# EAGLE board MultiBoard (EAGLE 6.4)
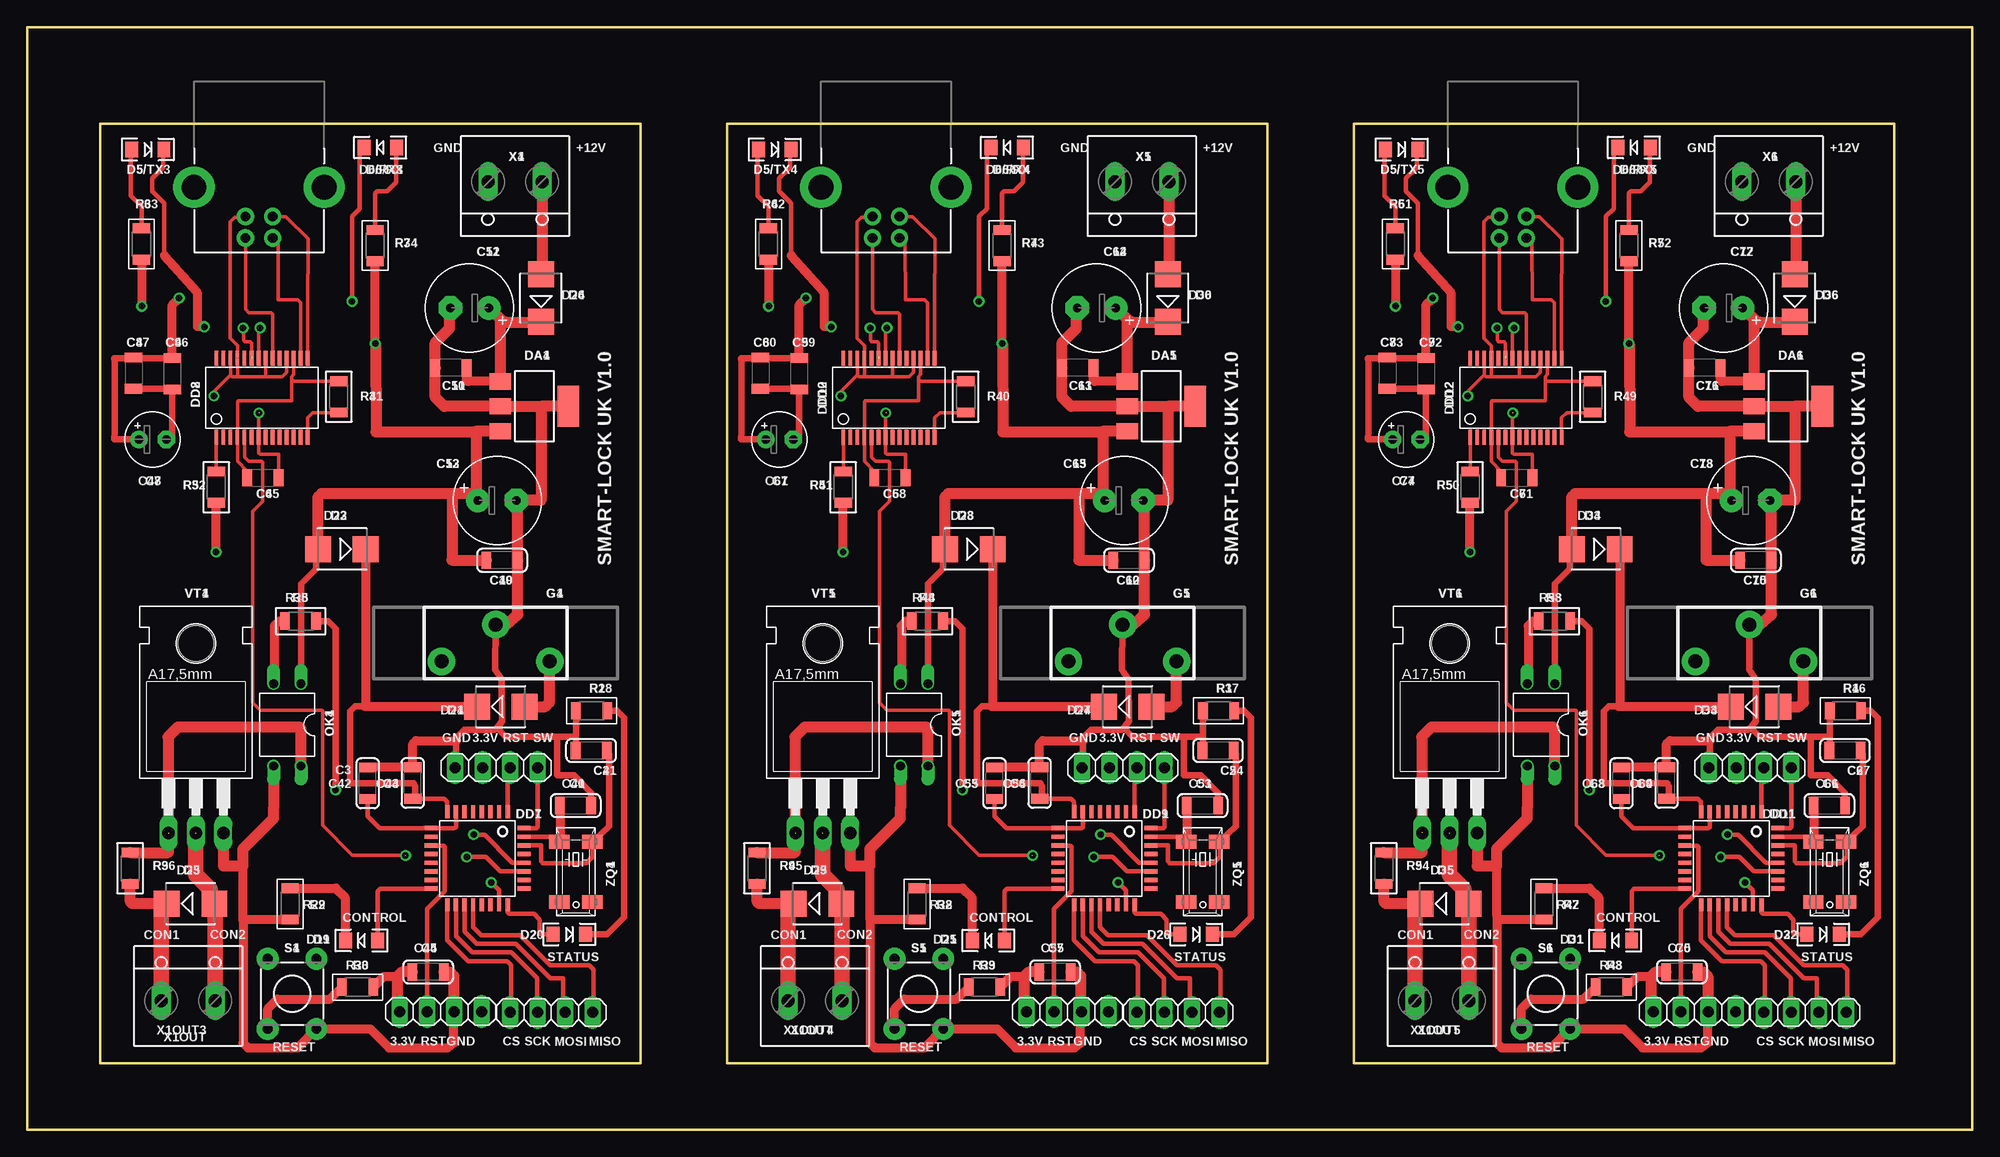
[diagram p0: board, top side]
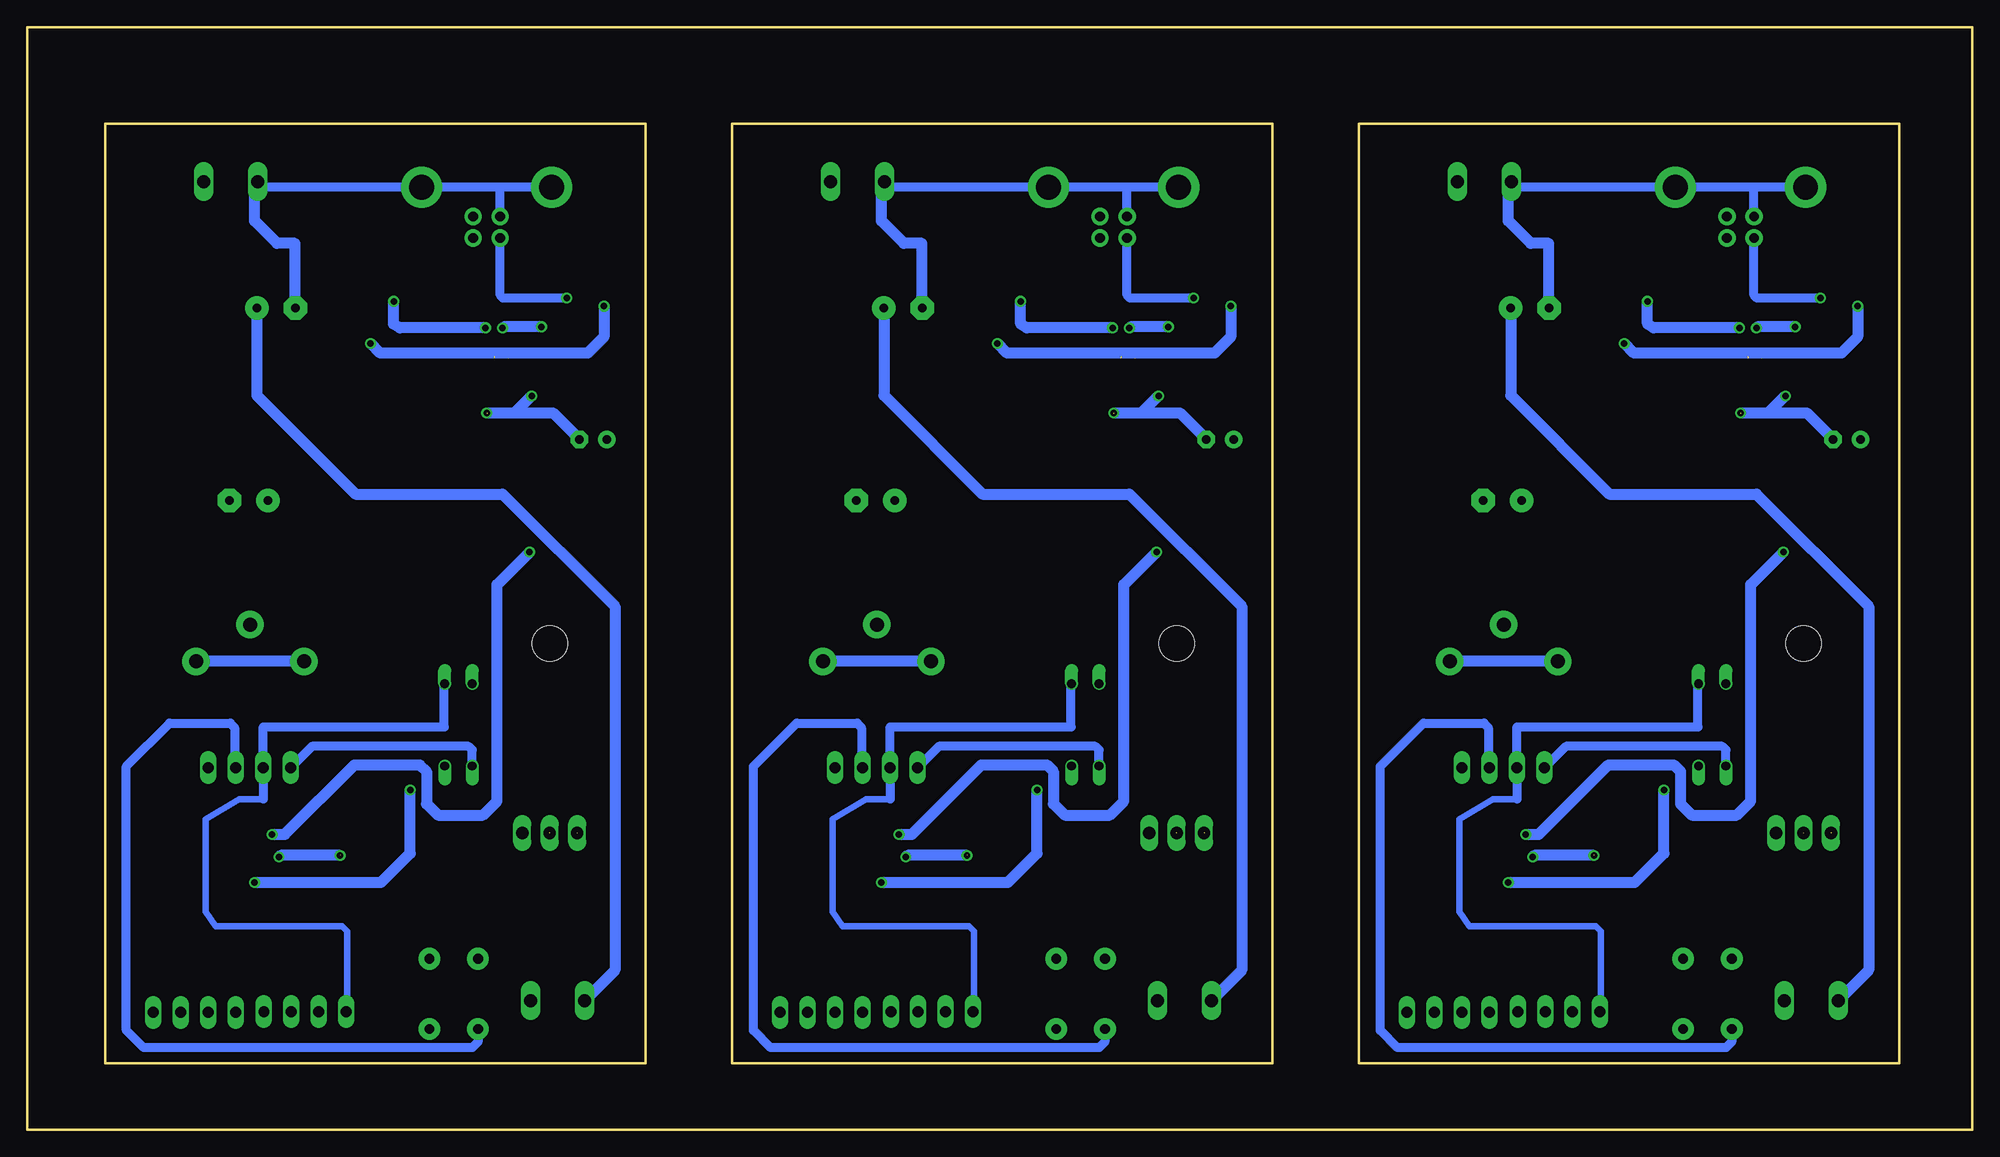
[diagram p1: board, bottom side, seen from below]

Size 180 x 102 mm. Coordinates in mm from the lower left corner, seen from the top.
Outline: 6.76,6.15 56.76,6.15 56.76,93.05 6.76,93.05 6.76,6.15
Outline: 64.76,6.15 114.76,6.15 114.76,93.05 64.76,93.05 64.76,6.15
Outline: 122.76,6.15 172.76,6.15 172.76,93.05 122.76,93.05 122.76,6.15
Outline: 0,0 0,102 180,102 180,0 0,0
Copper layers (1*16): Top 0.035mm / dielectric 1.5mm / Bottom 0.035mm
Design rules "default *": minimum track width 0.25mm, minimum drill 15mil, track to track 12mil, track to pad 12mil, pad to pad 12mil, via to via 12mil, smd to smd 8mil, copper to edge 10mil, drill to drill 10mil, minimum pad ring 8mil, minimum via ring 8mil, stop-mask expansion 4mil, vias tented up to drill 0mil, thermal gap 10mil

## Footprints (pad centres in the part's own frame; a part is rotated, then mirrored left to right if it is on the bottom)
C1206 = smd 0.9 x 1.6: 1 -1.45,0; 2 1.45,0
E2,5-5 = drill 0.8 pad 1.6: + -1.27,0 | drill 0.8 pad 1.6 octagon: - 1.27,0
E3,5-8 = drill 0.8 pad 2.184: + -1.778,0 | drill 0.8 pad 2.184 octagon: - 1.778,0
LED-1206 = smd 1.2 x 1.4: A -1.5,0; C 1.5,0
SMB = smd 2.4 x 2.4: A 2.2,0; C -2.2,0
SOT223 = smd 1.5 x 2: 1 -2.3,-3.15; 2 0,-3.15; 3 2.3,-3.15 | smd 3.8 x 2: 4 0,3.15
LQFP32-7X7 = smd 1.2 x 0.4: 1 -4.3,2.8; 2 -4.3,2; 3 -4.3,1.2; 4 -4.3,0.4; 5 -4.3,-0.4; 6 -4.3,-1.2; 7 -4.3,-2; 8 -4.3,-2.8; 17 4.3,-2.8; 18 4.3,-2; 19 4.3,-1.2; 20 4.3,-0.4; 21 4.3,0.4; 22 4.3,1.2; 23 4.3,2; 24 4.3,2.8 | smd 0.4 x 1.2: 9 -2.8,-4.3; 10 -2,-4.3; 11 -1.2,-4.3; 12 -0.4,-4.3; 13 0.4,-4.3; 14 1.2,-4.3; 15 2,-4.3; 16 2.8,-4.3; 25 2.8,4.3; 26 2,4.3; 27 1.2,4.3; 28 0.4,4.3; 29 -0.4,4.3; 30 -1.2,4.3; 31 -2,4.3; 32 -2.8,4.3
SSOP28DB = smd 0.348 x 1.397: 1 -4.225,-3.656; 2 -3.575,-3.656; 3 -2.925,-3.656; 4 -2.275,-3.656; 5 -1.625,-3.656; 6 -0.975,-3.656; 7 -0.325,-3.656; 8 0.325,-3.656; 9 0.975,-3.656; 10 1.625,-3.656; 11 2.275,-3.656; 12 2.925,-3.656; 13 3.575,-3.656; 14 4.225,-3.656; 15 4.225,3.656; 16 3.575,3.656; 17 2.925,3.656; 18 2.275,3.656; 19 1.625,3.656; 20 0.975,3.656; 21 0.325,3.656; 22 -0.325,3.656; 23 -0.975,3.656; 24 -1.625,3.656; 25 -2.275,3.656; 26 -2.925,3.656; 27 -3.575,3.656; 28 -4.225,3.656
CH74 = drill 1.3 pad 2.54: P$1+ -5.08,0; P$2+ 4.92,0; P$3- -0.08,3.4
USB-B-PTH = drill 0.9 pad 1.6: D+ 0,1.25; D- 1.981,1.25; GND 0,-1.25; VBUS 1.981,-1.25 | drill 2.3 pad 3.81: S1 -2.718,-6.02; S2 -2.718,6.02
DIL04 = drill 0.813 offset: 1 -1.27,-3.81; 2 1.27,-3.81; 3 1.27,3.81; 4 -1.27,3.81
M1206 = smd 0.9 x 1.6: 1 -1.45,0; 2 1.45,0
TL1105 = drill 0.9 pad 2: 1 -2.25,3.25; 2 2.25,3.25; 3 -2.25,-3.25; 4 2.25,-3.25
TO220 = drill 1.118 long: 1 -2.54,-6.35; 2 0,-6.35; 3 2.54,-6.35 | hole 3.302: 0,11.176
W237-102 = drill 1.2 long: 1 -2.5,-1.27; 2 2.5,-1.27
1X04 = drill 1.016 long: 1 -3.81,0; 2 -1.27,0; 3 1.27,0; 4 3.81,0
MM20SS = smd 1.27 x 1.88: 1 -2.794,-1.524; 2 2.794,-1.524; 3 2.794,1.524; 4 -2.794,1.524

## Placement (x,y rotation side)
C40  8p  [C1206]  50.75,29.98 180 top
C41  8p  [C1206]  52.2,35.08 0 top
C42  1u  [C1206]  31.52,32.05 90 top
C43  1u  [C1206]  35.69,32.07 90 top
C44  100n  [C1206]  37.11,14.6 180 top
C45  100n  [C1206]  21.83,60.3 0 top
C46  100n  [C1206]  13.45,69.93 270 top
C47  10n  [C1206]  9.85,69.98 270 top
C48  10u  [E2,5-5]  11.62,63.86 0 top
C49  1u  [C1206]  43.95,52.67 180 top
C50  100n  [C1206]  39.22,70.47 180 top
C51  470u  [E3,5-8]  40.95,76.02 180 top
C52  470u  [E3,5-8]  43.5,58.22 0 top
C53  8p  [C1206]  108.75,29.98 180 top
C54  8p  [C1206]  110.2,35.08 0 top
C55  1u  [C1206]  89.52,32.05 90 top
C56  1u  [C1206]  93.69,32.07 90 top
C57  100n  [C1206]  95.11,14.6 180 top
C58  100n  [C1206]  79.83,60.3 0 top
C59  100n  [C1206]  71.45,69.93 270 top
C60  10n  [C1206]  67.85,69.98 270 top
C61  10u  [E2,5-5]  69.62,63.86 0 top
C62  1u  [C1206]  101.95,52.67 180 top
C63  100n  [C1206]  97.22,70.47 180 top
C64  470u  [E3,5-8]  98.95,76.02 180 top
C65  470u  [E3,5-8]  101.5,58.22 0 top
C66  8p  [C1206]  166.75,29.98 180 top
C67  8p  [C1206]  168.2,35.08 0 top
C68  1u  [C1206]  147.52,32.05 90 top
C69  1u  [C1206]  151.69,32.07 90 top
C70  100n  [C1206]  153.11,14.6 180 top
C71  100n  [C1206]  137.83,60.3 0 top
C72  100n  [C1206]  129.45,69.93 270 top
C73  10n  [C1206]  125.85,69.98 270 top
C74  10u  [E2,5-5]  127.62,63.86 0 top
C75  1u  [C1206]  159.95,52.67 180 top
C76  100n  [C1206]  155.22,70.47 180 top
C77  470u  [E3,5-8]  156.95,76.02 180 top
C78  470u  [E3,5-8]  159.5,58.22 0 top
D5/TX3  RED  [LED-1206]  11.17,90.67 0 top
D5/TX4  RED  [LED-1206]  69.17,90.67 0 top
D5/TX5  RED  [LED-1206]  127.17,90.67 0 top
D6/RX3  RED  [LED-1206]  32.68,90.86 180 top
D6/RX4  RED  [LED-1206]  90.68,90.86 180 top
D6/RX5  RED  [LED-1206]  148.68,90.86 180 top
D19  RED  [LED-1206]  30.96,17.5 180 top
D20  RED  [LED-1206]  50.17,18.07 0 top
D21  SK24  [SMB]  43.83,39.14 0 top
D22  SK24  [SMB]  29.15,53.71 180 top
D23  SK24  [SMB]  15.14,20.92 0 top
D24  SK24  [SMB]  47.55,76.92 90 top
D25  RED  [LED-1206]  88.96,17.5 180 top
D26  RED  [LED-1206]  108.17,18.07 0 top
D27  SK24  [SMB]  101.83,39.14 0 top
D28  SK24  [SMB]  87.15,53.71 180 top
D29  SK24  [SMB]  73.14,20.92 0 top
D30  SK24  [SMB]  105.55,76.92 90 top
D31  RED  [LED-1206]  146.96,17.5 180 top
D32  RED  [LED-1206]  166.17,18.07 0 top
D33  SK24  [SMB]  159.83,39.14 0 top
D34  SK24  [SMB]  145.15,53.71 180 top
D35  SK24  [SMB]  131.14,20.92 0 top
D36  SK24  [SMB]  163.55,76.92 90 top
DA4  APU1206H-33  [SOT223]  46.95,66.92 270 top
DA5  APU1206H-33  [SOT223]  104.95,66.92 270 top
DA6  APU1206H-33  [SOT223]  162.95,66.92 270 top
DD7  STM8L152K6T6  [LQFP32-7X7]  41.68,25.1 270 top
DD8  FT232RLSSOP  [SSOP28DB]  21.75,67.71 0 top
DD9  STM8L152K6T6  [LQFP32-7X7]  99.68,25.1 270 top
DD10  FT232RLSSOP  [SSOP28DB]  79.75,67.71 0 top
DD11  STM8L152K6T6  [LQFP32-7X7]  157.68,25.1 270 top
DD12  FT232RLSSOP  [SSOP28DB]  137.75,67.71 0 top
G4  BAT_3VCH-74  [CH74]  43.44,43.33 0 top
G5  BAT_3VCH-74  [CH74]  101.44,43.33 0 top
G6  BAT_3VCH-74  [CH74]  159.44,43.33 0 top
JP4  USB-B  [USB-B-PTH]  21.47,84.47 270 top
JP5  USB-B  [USB-B-PTH]  79.47,84.47 270 top
JP6  USB-B  [USB-B-PTH]  137.47,84.47 270 top
OK4  PC817  [DIL04]  24.08,37.45 180 top
OK5  PC817  [DIL04]  82.08,37.45 180 top
OK6  PC817  [DIL04]  140.08,37.45 180 top
R28  330  [M1206]  52.24,38.75 0 top
R29  330  [M1206]  24.34,20.89 90 top
R30  10k  [M1206]  30.59,13.2 0 top
R31  10k  [M1206]  28.85,67.79 270 top
R32  270  [M1206]  17.52,59.44 270 top
R33  330  [M1206]  10.59,81.93 270 top
R34  330  [M1206]  32.22,81.78 270 top
R35  1k  [M1206]  25.31,47.05 180 top
R36  1k  [M1206]  9.54,24.19 270 top
R37  330  [M1206]  110.24,38.75 0 top
R38  330  [M1206]  82.34,20.89 90 top
R39  10k  [M1206]  88.59,13.2 0 top
R40  10k  [M1206]  86.85,67.79 270 top
R41  270  [M1206]  75.52,59.44 270 top
R42  330  [M1206]  68.59,81.93 270 top
R43  330  [M1206]  90.22,81.78 270 top
R44  1k  [M1206]  83.31,47.05 180 top
R45  1k  [M1206]  67.54,24.19 270 top
R46  330  [M1206]  168.24,38.75 0 top
R47  330  [M1206]  140.34,20.89 90 top
R48  10k  [M1206]  146.59,13.2 0 top
R49  10k  [M1206]  144.85,67.79 270 top
R50  270  [M1206]  133.52,59.44 270 top
R51  330  [M1206]  126.59,81.93 270 top
R52  330  [M1206]  148.22,81.78 270 top
R53  1k  [M1206]  141.31,47.05 180 top
R54  1k  [M1206]  125.54,24.19 270 top
S4  [TL1105]  24.52,12.57 0 top
S5  [TL1105]  82.52,12.57 0 top
S6  [TL1105]  140.52,12.57 0 top
VT4  TIP122  [TO220]  15.63,33.8 0 top
VT5  TIP122  [TO220]  73.63,33.8 0 top
VT6  TIP122  [TO220]  131.63,33.8 0 top
X1OUT3  [W237-102]  14.91,13.22 0 top
X1OUT4  [W237-102]  72.91,13.22 0 top
X1OUT5  [W237-102]  130.91,13.22 0 top
X4  [W237-102]  45.15,86.42 180 top
X5  [W237-102]  103.15,86.42 180 top
X6  [W237-102]  161.15,86.42 180 top
XP1.1-SPI3  [1X04]  48.51,10.85 0 top
XP1.1-SPI4  [1X04]  106.51,10.85 0 top
XP1.1-SPI5  [1X04]  164.51,10.85 0 top
XP1.2-SPI3  [1X04]  38.27,10.92 180 top
XP1.2-SPI4  [1X04]  96.27,10.92 180 top
XP1.2-SPI5  [1X04]  154.27,10.92 180 top
XP2-SWIM3  [1X04]  43.41,33.49 180 top
XP2-SWIM4  [1X04]  101.41,33.49 180 top
XP2-SWIM5  [1X04]  159.41,33.49 180 top
ZQ4  [MM20SS]  50.79,23.85 270 top
ZQ5  [MM20SS]  108.79,23.85 270 top
ZQ6  [MM20SS]  166.79,23.85 270 top

## Library data of the parts
C40-C44 C49 C53-C57 C62 C66-C70 C75 DA4-DA6 DD7 DD9 DD11 G4-G6 R28-R30 R33 R34 R37-R39 R42 R43 R46-R48 R51 R52 S4-S6 VT4-VT6 XP1.1-SPI3-XP1.1-SPI5 XP1.2-SPI3-XP1.2-SPI5 XP2-SWIM3-XP2-SWIM5 = SMART LOCK UK
C45-C47 C50 C58-C60 C63 C71-C73 C76 R31 R32 R35 R36 R40 R41 R44 R45 R49 R50 R53 R54 = CondAdapt
C48 C51 C52 C61 C64 C65 C74 C77 C78 = LAMP_RES
D5/TX3-D5/TX5 D6/RX3-D6/RX5 D19 D20 D25 D26 D31 D32 = SMART LOCK UK; PROD_ID: DIO-00809
D21-D24 D27-D30 D33-D36 = NOVOSIB
DD8 DD10 DD12 = Bullet_cont_prom; PROD_ID: IC-00870
JP4-JP6 = Bullet_cont_prom
OK4-OK6 = SMART LOCK UK; MPN: PC817X4J000F; OC_FARNELL: 9707727; OC_NEWARK: 97K7059
X1OUT3-X1OUT5 X4-X6 = SMART LOCK UK; MPN: 237-102; OC_FARNELL: unknown; OC_NEWARK: 70K9898
ZQ4-ZQ6 = SMART LOCK UK; OC_FARNELL: unknown; OC_NEWARK: unknown

## Nets
+3V4: C44.2 C49.2 C52.+ D22.A DA4.3 OK4.1 R30.2 R33.2 R34.2 XP1.2-SPI3.4 XP2-SWIM3.3
+3V5: C57.2 C62.2 C65.+ D28.A DA5.3 OK5.1 R39.2 R42.2 R43.2 XP1.2-SPI4.4 XP2-SWIM4.3
+3V6: C70.2 C75.2 C78.+ D34.A DA6.3 OK6.1 R48.2 R51.2 R52.2 XP1.2-SPI5.4 XP2-SWIM5.3
+12V3: C50.1 C51.+ D23.C D24.C DA4.1 R36.2 X1OUT3.1
+12V4: C63.1 C64.+ D29.C D30.C DA5.1 R45.2 X1OUT4.1
+12V5: C76.1 C77.+ D35.C D36.C DA6.1 R54.2 X1OUT5.1
CONTROL3: D19.A DD7.16
CONTROL4: D25.A DD9.16
CONTROL5: D31.A DD11.16
FT_RXD3: DD7.28 R32.2
FT_RXD4: DD9.28 R41.2
FT_RXD5: DD11.28 R50.2
FT_TXD3: DD7.27 DD8.5
FT_TXD4: DD9.27 DD10.5
FT_TXD5: DD11.27 DD12.5
GND3: C40.1 C41.1 C42.2 C43.2 C44.1 C45.2 C46.2 C47.2 C48.- C49.1 C50.2 C51.- C52.- DA4.2 DA4.4 DD8.7 DD8.18 DD8.21 DD8.25 DD8.26 G4.P$3- JP4.GND JP4.S1 JP4.S2 OK4.3 R28.1 R29.1 S4.4 VT4.3 X4.2 XP1.2-SPI3.2 XP2-SWIM3.4
GND4: C53.1 C54.1 C55.2 C56.2 C57.1 C58.2 C59.2 C60.2 C61.- C62.1 C63.2 C64.- C65.- DA5.2 DA5.4 DD10.7 DD10.18 DD10.21 DD10.25 DD10.26 G5.P$3- JP5.GND JP5.S1 JP5.S2 OK5.3 R37.1 R38.1 S5.4 VT5.3 X5.2 XP1.2-SPI4.2 XP2-SWIM4.4
GND5: C66.1 C67.1 C68.2 C69.2 C70.1 C71.2 C72.2 C73.2 C74.- C75.1 C76.2 C77.- C78.- DA6.2 DA6.4 DD12.7 DD12.18 DD12.21 DD12.25 DD12.26 G6.P$3- JP6.GND JP6.S1 JP6.S2 OK6.3 R46.1 R47.1 S6.4 VT6.3 X6.2 XP1.2-SPI5.2 XP2-SWIM5.4
MISO3: DD7.20 XP1.1-SPI3.4
MISO4: DD9.20 XP1.1-SPI4.4
MISO5: DD11.20 XP1.1-SPI5.4
MOSI3: DD7.19 XP1.1-SPI3.3
MOSI4: DD9.19 XP1.1-SPI4.3
MOSI5: DD11.19 XP1.1-SPI5.3
N$67: C40.2 DD7.31 ZQ4.1
N$68: C42.1 DD7.7 DD7.9
N$69: D20.C R28.2
N$70: D19.C R29.2
N$71: D21.A G4.P$1+ G4.P$2+
N$72: C43.1 D21.C D22.C DD7.8
N$73: C46.1 C47.1 C48.+ DD8.20 JP4.VBUS
N$74: DD8.16 JP4.D-
N$75: DD8.15 JP4.D+
N$76: C45.1 DD8.4 DD8.17 R31.1
N$77: DD8.14 R31.2
N$78: DD8.1 R32.1
N$79: D5/TX3.A R33.1
N$80: D6/RX3.A R34.1
N$81: D5/TX3.C DD8.23
N$82: D6/RX3.C DD8.22
N$83: D23.A VT4.2 X1OUT3.2
N$84: OK4.2 R35.2
N$85: DD7.23 R35.1
N$86: OK4.4 R36.1 VT4.1
N$87: D24.A X4.1
N$88: C41.2 DD7.30 ZQ4.4
N$89: C53.2 DD9.31 ZQ5.1
N$90: C55.1 DD9.7 DD9.9
N$91: D26.C R37.2
N$92: D25.C R38.2
N$93: D27.A G5.P$1+ G5.P$2+
N$94: C56.1 D27.C D28.C DD9.8
N$95: C59.1 C60.1 C61.+ DD10.20 JP5.VBUS
N$96: DD10.16 JP5.D-
N$97: DD10.15 JP5.D+
N$98: C58.1 DD10.4 DD10.17 R40.1
N$99: DD10.14 R40.2
N$100: DD10.1 R41.1
N$101: D5/TX4.A R42.1
N$102: D6/RX4.A R43.1
N$103: D5/TX4.C DD10.23
N$104: D6/RX4.C DD10.22
N$105: D29.A VT5.2 X1OUT4.2
N$106: OK5.2 R44.2
N$107: DD9.23 R44.1
N$108: OK5.4 R45.1 VT5.1
N$109: D30.A X5.1
N$110: C54.2 DD9.30 ZQ5.4
N$111: C66.2 DD11.31 ZQ6.1
N$112: C68.1 DD11.7 DD11.9
N$113: D32.C R46.2
N$114: D31.C R47.2
N$115: D33.A G6.P$1+ G6.P$2+
N$116: C69.1 D33.C D34.C DD11.8
N$117: C72.1 C73.1 C74.+ DD12.20 JP6.VBUS
N$118: DD12.16 JP6.D-
N$119: DD12.15 JP6.D+
N$120: C71.1 DD12.4 DD12.17 R49.1
N$121: DD12.14 R49.2
N$122: DD12.1 R50.1
N$123: D5/TX5.A R51.1
N$124: D6/RX5.A R52.1
N$125: D5/TX5.C DD12.23
N$126: D6/RX5.C DD12.22
N$127: D35.A VT6.2 X1OUT5.2
N$128: OK6.2 R53.2
N$129: DD11.23 R53.1
N$130: OK6.4 R54.1 VT6.1
N$131: D36.A X6.1
N$132: C67.2 DD11.30 ZQ6.4
NRST3: DD7.1 R30.1 S4.3 XP2-SWIM3.2
NRST4: DD9.1 R39.1 S5.3 XP2-SWIM4.2
NRST5: DD11.1 R48.1 S6.3 XP2-SWIM5.2
RESET3: DD7.11 XP1.2-SPI3.3
RESET4: DD9.11 XP1.2-SPI4.3
RESET5: DD11.11 XP1.2-SPI5.3
SC3: DD7.17 XP1.1-SPI3.1
SC4: DD9.17 XP1.1-SPI4.1
SC5: DD11.17 XP1.1-SPI5.1
SCK3: DD7.18 XP1.1-SPI3.2
SCK4: DD9.18 XP1.1-SPI4.2
SCK5: DD11.18 XP1.1-SPI5.2
STATUS3: D20.A DD7.24
STATUS4: D26.A DD9.24
STATUS5: D32.A DD11.24
SWIM3: DD7.32 XP2-SWIM3.1
SWIM4: DD9.32 XP2-SWIM4.1
SWIM5: DD11.32 XP2-SWIM5.1

## Tracks (layer width: path | path; a pad name or v marks a point on that pad's centre or on a via)
+3V4  (via drill 0.6)
  Top 0.305: 10.59,76.21 v10.62,76.18 | 34.24,11.14 XP1.2-SPI3.4 | v32.23,72.72 v32.22,72.73 | 26.74,53.92 D22.A | 26.95,58.58 27.24,58.87 | 41.62,64.61 41.55,64.11 | 41.55,58.39 C52.+ | 25.38,41.29 OK4.1
  Top 0.406: v32.22,72.73 32.25,72.71 | 41.49,64.58 41.55,64.11
  Top 0.61: 39.35,58.72 39.2,58.87 | 26.74,53.92 26.74,51.9 25.35,50.51 OK4.1
  Top 0.813: R33.2 10.59,76.21 | v32.22,72.73 R34.2 | 34.24,14.13 32.97,14.13 R30.2
  Top 1.016: C44.2 34.71,14.6 34.24,14.13 34.24,11.14 | DA4.3 43.36,64.61 41.62,64.61 | D22.A 26.95,58.58 | 27.24,58.87 39.2,58.87 41.07,58.87 C52.+ 41.4,58.22 | 41.55,64.11 41.55,58.39 | 32.25,72.71 32.28,64.56 41.49,64.58 | 39.35,58.72 39.35,52.7 39.33,52.68 C49.2
  Bottom 0.305: 25.4,41.21 OK4.1 | 34.4,10.98 XP1.2-SPI3.4
  Bottom 0.61: 42.14,30.57 44.39,30.57 47.48,28.72 47.48,20.17 46.55,18.82 34.85,18.82 34.4,18.37 34.4,10.98
  Bottom 0.813: 25.4,41.21 25.4,37.27 26.32,37.26 42.14,37.26 XP2-SWIM3.3 42.14,30.57
  Bottom 1.016: v10.62,76.18 10.62,73.33 12.12,71.83 31.32,71.83 v32.22,72.73
+3V5  (via drill 0.6)
  Top 0.305: 68.59,76.21 v68.62,76.18 | 92.24,11.14 XP1.2-SPI4.4 | v90.23,72.72 v90.22,72.73 | 84.74,53.92 D28.A | 84.95,58.58 85.24,58.87 | 99.62,64.61 99.55,64.11 | 99.55,58.39 C65.+ | 83.38,41.29 OK5.1
  Top 0.406: v90.22,72.73 90.25,72.71 | 99.49,64.58 99.55,64.11
  Top 0.61: 97.35,58.72 97.2,58.87 | 84.74,53.92 84.74,51.9 83.35,50.51 OK5.1
  Top 0.813: R42.2 68.59,76.21 | v90.22,72.73 R43.2 | 92.24,14.13 90.97,14.13 R39.2
  Top 1.016: C57.2 92.71,14.6 92.24,14.13 92.24,11.14 | DA5.3 101.36,64.61 99.62,64.61 | D28.A 84.95,58.58 | 85.24,58.87 97.2,58.87 99.07,58.87 C65.+ 99.4,58.22 | 99.55,64.11 99.55,58.39 | 90.25,72.71 90.28,64.56 99.49,64.58 | 97.35,58.72 97.35,52.7 97.33,52.68 C62.2
  Bottom 0.305: 83.4,41.21 OK5.1 | 92.4,10.98 XP1.2-SPI4.4
  Bottom 0.61: 100.14,30.57 102.39,30.57 105.48,28.72 105.48,20.17 104.55,18.82 92.85,18.82 92.4,18.37 92.4,10.98
  Bottom 0.813: 83.4,41.21 83.4,37.27 84.32,37.26 100.14,37.26 XP2-SWIM4.3 100.14,30.57
  Bottom 1.016: v68.62,76.18 68.62,73.33 70.12,71.83 89.32,71.83 v90.22,72.73
+3V6  (via drill 0.6)
  Top 0.305: 126.59,76.21 v126.62,76.18 | 150.24,11.14 XP1.2-SPI5.4 | v148.23,72.72 v148.22,72.73 | 142.74,53.92 D34.A | 142.95,58.58 143.24,58.87 | 157.62,64.61 157.55,64.11 | 157.55,58.39 C78.+ | 141.38,41.29 OK6.1
  Top 0.406: v148.22,72.73 148.25,72.71 | 157.49,64.58 157.55,64.11
  Top 0.61: 155.35,58.72 155.2,58.87 | 142.74,53.92 142.74,51.9 141.35,50.51 OK6.1
  Top 0.813: R51.2 126.59,76.21 | v148.22,72.73 R52.2 | 150.24,14.13 148.97,14.13 R48.2
  Top 1.016: C70.2 150.71,14.6 150.24,14.13 150.24,11.14 | DA6.3 159.36,64.61 157.62,64.61 | D34.A 142.95,58.58 | 143.24,58.87 155.2,58.87 157.07,58.87 C78.+ 157.4,58.22 | 157.55,64.11 157.55,58.39 | 148.25,72.71 148.28,64.56 157.49,64.58 | 155.35,58.72 155.35,52.7 155.33,52.68 C75.2
  Bottom 0.305: 141.4,41.21 OK6.1 | 150.4,10.98 XP1.2-SPI5.4
  Bottom 0.61: 158.14,30.57 160.39,30.57 163.48,28.72 163.48,20.17 162.55,18.82 150.85,18.82 150.4,18.37 150.4,10.98
  Bottom 0.813: 141.4,41.21 141.4,37.27 142.32,37.26 158.14,37.26 XP2-SWIM5.3 158.14,30.57
  Bottom 1.016: v126.62,76.18 126.62,73.33 128.12,71.83 147.32,71.83 v148.22,72.73
+12V3
  Top 0.305: 44.41,74.66 44.4,74.67 | 40.78,69.22 40.66,69.34 | C50.1
  Top 0.61: 12.41,20.39 D23.C | 9.7,20.92 9.55,21.07 | R36.2
  Top 0.813: 47.5,74.67 D24.C | DA4.1 40.78,69.22 | 40.66,69.34 C50.1
  Top 1.016: D23.C 9.7,20.92 | 9.55,21.07 R36.2 | 47.5,74.67 44.4,74.67 44.08,74.67 43.8,74.95 | 43.8,74.95 C51.+ | DA4.1 43.8,74.95
  Top 1.422: X1OUT3.1 12.41,20.39
  Bottom 1.016: C51.+ 42.73,67.93 33.6,58.8 20,58.8 9.6,48.4 9.6,14.76 X1OUT3.1
+12V4
  Top 0.305: 102.41,74.66 102.4,74.67 | 98.78,69.22 98.66,69.34 | C63.1
  Top 0.61: 70.41,20.39 D29.C | 67.7,20.92 67.55,21.07 | R45.2
  Top 0.813: 105.5,74.67 D30.C | DA5.1 98.78,69.22 | 98.66,69.34 C63.1
  Top 1.016: D29.C 67.7,20.92 | 67.55,21.07 R45.2 | 105.5,74.67 102.4,74.67 102.08,74.67 101.8,74.95 | 101.8,74.95 C64.+ | DA5.1 101.8,74.95
  Top 1.422: X1OUT4.1 70.41,20.39
  Bottom 1.016: C64.+ 100.73,67.93 91.6,58.8 78,58.8 67.6,48.4 67.6,14.76 X1OUT4.1
+12V5
  Top 0.305: 160.41,74.66 160.4,74.67 | 156.78,69.22 156.66,69.34 | C76.1
  Top 0.61: 128.41,20.39 D35.C | 125.7,20.92 125.55,21.07 | R54.2
  Top 0.813: 163.5,74.67 D36.C | DA6.1 156.78,69.22 | 156.66,69.34 C76.1
  Top 1.016: D35.C 125.7,20.92 | 125.55,21.07 R54.2 | 163.5,74.67 160.4,74.67 160.08,74.67 159.8,74.95 | 159.8,74.95 C77.+ | DA6.1 159.8,74.95
  Top 1.422: X1OUT5.1 128.41,20.39
  Bottom 1.016: C77.+ 158.73,67.93 149.6,58.8 136,58.8 125.6,48.4 125.6,14.76 X1OUT5.1
CONTROL3
  Top 0.406: D19.A 32.46,22.07 32.68,22.29 DD7.16
CONTROL4
  Top 0.406: D25.A 90.46,22.07 90.68,22.29 DD9.16
CONTROL5
  Top 0.406: D31.A 148.46,22.07 148.68,22.29 DD11.16
FT_RXD3  (via drill 0.6)
  Top 0.305: 17.5,57.97 R32.2
  Top 0.406: DD7.28 44.9,24.69 43.6,26 43.6,26.02 42.33,27.29 41.35,27.29 v41.33,27.31
  Top 0.813: v17.5,53.44 17.5,57.97
  Bottom 1.016: v41.33,27.31 40.14,27.31 33.69,33.76 27.65,33.76 27.03,33.14 27.03,30.15 25.97,29.09 21.81,29.09 20.51,30.39 20.51,50.43 v17.5,53.44
FT_RXD4  (via drill 0.6)
  Top 0.305: 75.5,57.97 R41.2
  Top 0.406: DD9.28 102.9,24.69 101.6,26 101.6,26.02 100.33,27.29 99.35,27.29 v99.33,27.31
  Top 0.813: v75.5,53.44 75.5,57.97
  Bottom 1.016: v99.33,27.31 98.14,27.31 91.69,33.76 85.65,33.76 85.03,33.14 85.03,30.15 83.97,29.09 79.81,29.09 78.51,30.39 78.51,50.43 v75.5,53.44
FT_RXD5  (via drill 0.6)
  Top 0.305: 133.5,57.97 R50.2
  Top 0.406: DD11.28 160.9,24.69 159.6,26 159.6,26.02 158.33,27.29 157.35,27.29 v157.33,27.31
  Top 0.813: v133.5,53.44 133.5,57.97
  Bottom 1.016: v157.33,27.31 156.14,27.31 149.69,33.76 143.65,33.76 143.03,33.14 143.03,30.15 141.97,29.09 137.81,29.09 136.51,30.39 136.51,50.43 v133.5,53.44
FT_TXD3  (via drill 0.6)  (1 unrouted)
  Top 0.305: DD8.5 20.12,62.19 20.5,61.82 21.73,61.82 21.81,61.74 21.81,58.14 20.87,57.2 20.87,39.51 21.59,38.79 27.3,38.79 27.35,38.74 27.35,28.15 30.07,25.38 34.97,25.38
  Top 0.406: DD7.27 43.77,23.91 42.44,25.24 v40.7,25.24 v40.69,25.23
  Bottom 1.016: v35.03,25.37 40.53,25.37 v40.69,25.23
FT_TXD4  (via drill 0.6)  (1 unrouted)
  Top 0.305: DD10.5 78.12,62.19 78.5,61.82 79.73,61.82 79.81,61.74 79.81,58.14 78.87,57.2 78.87,39.51 79.59,38.79 85.3,38.79 85.35,38.74 85.35,28.15 88.07,25.38 92.97,25.38
  Top 0.406: DD9.27 101.77,23.91 100.44,25.24 v98.7,25.24 v98.69,25.23
  Bottom 1.016: v93.03,25.37 98.53,25.37 v98.69,25.23
FT_TXD5  (via drill 0.6)  (1 unrouted)
  Top 0.305: DD12.5 136.12,62.19 136.5,61.82 137.73,61.82 137.81,61.74 137.81,58.14 136.87,57.2 136.87,39.51 137.59,38.79 143.3,38.79 143.35,38.74 143.35,28.15 146.07,25.38 150.97,25.38
  Top 0.406: DD11.27 159.77,23.91 158.44,25.24 v156.7,25.24 v156.69,25.23
  Bottom 1.016: v151.03,25.37 156.53,25.37 v156.69,25.23
GND3  (via drill 0.6)  (2 unrouted)
  Top 0.305: 39.49,10.97 XP1.2-SPI3.2 | 45.2,52.47 C49.1 | 39.2,75.99 C51.- 39.08,75.93 | 31.54,33.52 C42.2 | C45.2 23.28,62.46 23.27,62.47 21.58,62.47 21.43,62.57 21.43,64 DD8.7 21.43,66.27 | DD8.26 18.82,69.81 | 18.82,69.81 18.99,69.65 19.59,69.65 | 19.59,69.65 22.07,69.65 | 22.07,69.65 23.62,69.65 24.03,70.08 24.03,71.32 DD8.18 | 19.48,71.35 19.48,69.78 19.59,69.65 | DD8.21 22.07,69.66 22.07,69.65 | v17.3,67.87 17.3,68.29 18.82,69.81 | DD8.25 19.48,72.53 18.8,73.2 18.8,84 19.2,84.4 20.15,84.4 JP4.GND
  Top 0.406: C46.2 13.45,68.53 | 20.06,19.44 20.02,19.4
  Top 0.61: C46.2 13.45,63.86 C48.- | 13.45,68.53 C47.2 | G4.P$3- 43.33,42.57 43.93,41.68 43.94,37.79 43.48,37.19 | 43.48,37.19 43.28,37 40.45,37 39.71,36.26 39.71,36 39.71,33.6 | 39.57,33.52 XP2-SWIM3.4 | C40.1 52.18,30 52.18,31.19 50.6,32.77 49.04,32.77 49.04,36.37 | 49.04,36.37 44.3,36.37 43.48,37.19 | C41.1 50.79,36.37 | 50.79,36.37 49.04,36.37 | R28.1 50.79,36.37 | 20,19.38 20.02,19.4
  Top 0.813: 20,19.38 20,8.02 20.45,7.57 25.02,7.57 S4.4 31.75,9.32 33.5,7.57 38.9,7.57 39.49,8.04 39.49,10.75 XP1.2-SPI3.2 | 39.71,33.6 XP2-SWIM3.4 | 31.54,33.52 C43.2 35.69,35.69 36,36 39.71,36 | R29.1 20.06,19.44 | 20.02,19.4 19.98,19.96 19.99,24.41
  Top 1.016: 47.55,66.92 DA4.2 38.6,66.92 37.77,67.75 C50.2 37.77,72.81 39.08,74.12 39.08,75.93 | 47.55,66.92 47.55,58.22 C52.- 45.4,58.1 C49.1 45.4,47.65 44.31,46.73 G4.P$3- | DA4.4 47.55,66.92 | OK4.3 22.81,29.75 22.8,29.74 22.8,28.8 19.99,25.99 19.99,24.41 | C44.1 39.1,14.6 39.49,14.21 39.49,10.97 | VT4.3 18.17,24.41 19.99,24.41 | 19.99,24.41
  Bottom 0.406: 20.22,87.01 20.4,87.19
  Bottom 0.813: OK4.3 22.81,35.13 23.15,35.47 37.62,35.47 XP2-SWIM3.4 | JP4.S1 20.4,87.19 JP4.S2 42.15,87.19 X4.2 | JP4.GND 20.22,87.01
  Bottom 1.016: X4.2 42.95,87.39 42.95,84.07 40.87,81.99 39.2,81.99 39.2,76.02 C51.- | C48.- 15.33,66.3 v21.46,66.3 18.87,66.3 v17.3,67.87
GND4  (via drill 0.6)  (2 unrouted)
  Top 0.305: 97.49,10.97 XP1.2-SPI4.2 | 103.2,52.47 C62.1 | 97.2,75.99 C64.- 97.08,75.93 | 89.54,33.52 C55.2 | C58.2 81.28,62.46 81.27,62.47 79.58,62.47 79.43,62.57 79.43,64 DD10.7 79.42,66.27 | DD10.26 76.83,69.81 | 76.83,69.81 76.99,69.65 77.59,69.65 | 77.59,69.65 80.07,69.65 | 80.07,69.65 81.62,69.65 82.03,70.08 82.03,71.32 DD10.18 | 77.48,71.35 77.48,69.78 77.59,69.65 | DD10.21 80.08,69.66 80.07,69.65 | v75.3,67.87 75.3,68.29 76.83,69.81 | DD10.25 77.47,72.53 76.8,73.2 76.8,84 77.2,84.4 78.15,84.4 JP5.GND
  Top 0.406: C59.2 71.45,68.53 | 78.06,19.44 78.02,19.4
  Top 0.61: C59.2 71.45,63.86 C61.- | 71.45,68.53 C60.2 | G5.P$3- 101.33,42.57 101.93,41.68 101.94,37.79 101.47,37.19 | 101.47,37.19 101.28,37 98.45,37 97.71,36.26 97.71,36 97.71,33.6 | 97.57,33.52 XP2-SWIM4.4 | C53.1 110.18,30 110.18,31.19 108.6,32.77 107.04,32.77 107.04,36.37 | 107.04,36.37 102.3,36.37 101.47,37.19 | C54.1 108.79,36.37 | 108.79,36.37 107.04,36.37 | R37.1 108.79,36.37 | 78,19.38 78.02,19.4
  Top 0.813: 78,19.38 78,8.02 78.45,7.57 83.02,7.57 S5.4 89.75,9.32 91.5,7.57 96.9,7.57 97.49,8.04 97.49,10.75 XP1.2-SPI4.2 | 97.71,33.6 XP2-SWIM4.4 | 89.54,33.52 C56.2 93.69,35.69 94,36 97.71,36 | R38.1 78.06,19.44 | 78.02,19.4 77.98,19.96 77.99,24.41
  Top 1.016: 105.55,66.92 DA5.2 96.6,66.92 95.77,67.75 C63.2 95.77,72.81 97.08,74.12 97.08,75.93 | 105.55,66.92 105.55,58.22 C65.- 103.4,58.1 C62.1 103.4,47.65 102.31,46.73 G5.P$3- | DA5.4 105.55,66.92 | OK5.3 80.81,29.75 80.8,29.74 80.8,28.8 77.99,25.99 77.99,24.41 | C57.1 97.1,14.6 97.49,14.21 97.49,10.97 | VT5.3 76.17,24.41 77.99,24.41 | 77.99,24.41
  Bottom 0.406: 78.22,87.01 78.4,87.19
  Bottom 0.813: OK5.3 80.81,35.13 81.15,35.47 95.62,35.47 XP2-SWIM4.4 | JP5.S1 78.4,87.19 JP5.S2 100.15,87.19 X5.2 | JP5.GND 78.22,87.01
  Bottom 1.016: X5.2 100.95,87.39 100.95,84.07 98.87,81.99 97.2,81.99 97.2,76.02 C64.- | C61.- 73.33,66.3 v79.46,66.3 76.87,66.3 v75.3,67.87
GND5  (via drill 0.6)  (2 unrouted)
  Top 0.305: 155.49,10.97 XP1.2-SPI5.2 | 161.2,52.47 C75.1 | 155.2,75.99 C77.- 155.08,75.93 | 147.54,33.52 C68.2 | C71.2 139.28,62.46 139.27,62.47 137.58,62.47 137.43,62.57 137.43,64 DD12.7 137.43,66.27 | DD12.26 134.82,69.81 | 134.82,69.81 134.99,69.65 135.59,69.65 | 135.59,69.65 138.07,69.65 | 138.07,69.65 139.62,69.65 140.03,70.08 140.03,71.32 DD12.18 | 135.48,71.35 135.48,69.78 135.59,69.65 | DD12.21 138.07,69.66 138.07,69.65 | v133.3,67.87 133.3,68.29 134.82,69.81 | DD12.25 135.47,72.53 134.8,73.2 134.8,84 135.2,84.4 136.15,84.4 JP6.GND
  Top 0.406: C72.2 129.45,68.53 | 136.06,19.44 136.02,19.4
  Top 0.61: C72.2 129.45,63.86 C74.- | 129.45,68.53 C73.2 | G6.P$3- 159.33,42.57 159.93,41.68 159.94,37.79 159.47,37.19 | 159.47,37.19 159.28,37 156.45,37 155.71,36.26 155.71,36 155.71,33.6 | 155.57,33.52 XP2-SWIM5.4 | C66.1 168.18,30 168.18,31.19 166.6,32.77 165.04,32.77 165.04,36.37 | 165.04,36.37 160.3,36.37 159.47,37.19 | C67.1 166.79,36.37 | 166.79,36.37 165.04,36.37 | R46.1 166.79,36.37 | 136,19.38 136.02,19.4
  Top 0.813: 136,19.38 136,8.02 136.45,7.57 141.02,7.57 S6.4 147.75,9.32 149.5,7.57 154.9,7.57 155.49,8.04 155.49,10.75 XP1.2-SPI5.2 | 155.71,33.6 XP2-SWIM5.4 | 147.54,33.52 C69.2 151.69,35.69 152,36 155.71,36 | R47.1 136.06,19.44 | 136.02,19.4 135.98,19.96 135.99,24.41
  Top 1.016: 163.55,66.92 DA6.2 154.6,66.92 153.77,67.75 C76.2 153.77,72.81 155.08,74.12 155.08,75.93 | 163.55,66.92 163.55,58.22 C78.- 161.4,58.1 C75.1 161.4,47.65 160.31,46.73 G6.P$3- | DA6.4 163.55,66.92 | OK6.3 138.81,29.75 138.8,29.74 138.8,28.8 135.99,25.99 135.99,24.41 | C70.1 155.1,14.6 155.49,14.21 155.49,10.97 | VT6.3 134.17,24.41 135.99,24.41 | 135.99,24.41
  Bottom 0.406: 136.22,87.01 136.4,87.19
  Bottom 0.813: OK6.3 138.81,35.13 139.15,35.47 153.62,35.47 XP2-SWIM5.4 | JP6.S1 136.4,87.19 JP6.S2 158.15,87.19 X6.2 | JP6.GND 136.22,87.01
  Bottom 1.016: X6.2 158.95,87.39 158.95,84.07 156.87,81.99 155.2,81.99 155.2,76.02 C77.- | C74.- 131.33,66.3 v137.46,66.3 134.87,66.3 v133.3,67.87
MISO3
  Top 0.406: DD7.20 41.28,18.72 42,18 45.6,18 48.4,15.2 52,15.2 52.4,14.8 52.4,10.93 XP1.1-SPI3.4
MISO4
  Top 0.406: DD9.20 99.28,18.72 100,18 103.6,18 106.4,15.2 110,15.2 110.4,14.8 110.4,10.93 XP1.1-SPI4.4
MISO5
  Top 0.406: DD11.20 157.28,18.72 158,18 161.6,18 164.4,15.2 168,15.2 168.4,14.8 168.4,10.93 XP1.1-SPI5.4
MOSI3
  Top 0.406: DD7.19 40.48,18.32 41.6,17.2 45.2,17.2 48.4,14 49.6,14 49.6,11.03 XP1.1-SPI3.3
MOSI4
  Top 0.406: DD9.19 98.48,18.32 99.6,17.2 103.2,17.2 106.4,14 107.6,14 107.6,11.03 XP1.1-SPI4.3
MOSI5
  Top 0.406: DD11.19 156.48,18.32 157.6,17.2 161.2,17.2 164.4,14 165.6,14 165.6,11.03 XP1.1-SPI5.3
N$67
  Top 0.406: 49.3,26.68 ZQ4.1 48.81,27.1 DD7.31
  Top 0.813: C40.2 49.3,26.68
N$68
  Top 0.305: 39.54,27.9 39.68,28 | 39.68,29.38 DD7.7
  Top 0.406: C42.1 31.52,29.02 32.64,27.9 DD7.9 39.54,27.9 | 39.68,28 39.68,29.38
N$69
  Top 0.305: D20.C
  Top 0.61: R28.2 54.59,38.75 55.24,38.1 55.24,19.64 53.67,18.07 D20.C
N$70
  Top 0.406: 29.42,17.54 D19.C
  Top 0.813: R29.2 28.57,22.34 29.42,21.49 29.42,17.54
N$71
  Top 0.305: G4.P$2+
  Top 1.016: D21.A 47.97,39.14 48.35,39.52 G4.P$2+
  Bottom 1.016: G4.P$1+ G4.P$2+
N$72
  Top 0.305: D21.C | 31.35,39.25 31.25,39.15
  Top 0.406: C43.1 38.6,30.62 38.88,30.34 DD7.8
  Top 0.61: C43.1 35.91,30.84 35.91,31.75 35.79,32.06 29.9,32.06 29.9,38.71 30.34,39.15 31.25,39.15
  Top 0.813: 41.87,39.38 D21.C | 31.25,39.15 D21.C | D22.C 31.35,39.25
N$73  (via drill 0.6)
  Top 0.305: JP4.VBUS 20.22,75.88 20.52,75.58 22.57,75.58 22.73,75.42 DD8.20
  Top 0.406: 9.85,71.38 C47.1 9.8,71.38 | C48.+ 10.35,63.88
  Top 0.61: 9.85,71.38 C46.1 | 10.35,63.88 8.08,63.88 8.1,64.61 8.1,71.06 8.08,71.38 9.8,71.38
  Top 0.813: C46.1 13.45,76.31 v14.07,76.93
  Bottom 0.813: v14.07,76.93 19.95,76.93 20.22,77.2 JP4.VBUS
N$74
  Top 0.305: DD8.16 25.32,76.48 25.05,76.76 23.26,76.76 23.25,81.96 JP4.D-
N$75
  Top 0.305: DD8.15 25.97,79.14 26,79.23 26,82.4 23.93,84.47 JP4.D+
N$76
  Top 0.305: C45.1 20.38,60.93 19.48,61.83 DD8.4 19.48,67.34 19.55,67.42 24.5,67.42 24.5,69.4 | 24.5,69.4 24.5,69.64 24.67,69.88 DD8.17 | R31.1 24.71,69.24 24.5,69.4
N$77
  Top 0.305: R31.2 26.45,66.34 25.98,65.87 DD8.14
N$78
  Top 0.305: DD8.1 R32.1
  Top 0.406: R32.1
N$79
  Top 0.406: R33.1 10.59,85.41 9.6,86.4 9.6,90.6 D5/TX3.A
N$80
  Top 0.406: R34.1 32.22,86.62 32.4,86.8 33.3,86.8 34.16,87.66 34.16,90.84 D6/RX3.A
N$81  (via drill 0.6)  (1 unrouted)
  Top 0.305: 20.77,71.53 20.77,72.77 20.67,72.91 20.14,72.91 20.03,73.02 20.03,74 | 20.03,74 20.03,74.22 | v20,74.16 20,74.03 20.03,74
  Top 0.406: 12.71,80.86 12.71,85.69 11.6,86.8 11.6,88 12.6,89 12.6,90.6 D5/TX3.C
  Top 0.813: 12.71,80.86 15.73,77.45 15.75,74.3 v16.4,74.27
  Bottom 0.406: 19.89,74.27 v20,74.16
  Bottom 1.016: v16.4,74.27 19.89,74.27
N$82  (via drill 0.6)
  Top 0.305: DD8.22 21.43,74.2 21.55,74.2 v21.57,74.18 | v30.08,76.64 v30.07,76.63
  Top 0.406: v30.08,76.64 30.08,84.48 30.8,85.2 30.8,90.48 D6/RX3.C
  Bottom 1.016: v21.57,74.18 29.5,74.18 30.08,74.55 v30.07,76.63
N$83  (1 unrouted)
  Top 0.61: 17.41,20.43 16.8,21.04 17.22,21.04 D23.A 16.95,21.31
  Top 1.422: X1OUT3.2 17.41,20.43 | 16.95,21.31 16.95,22.24 15.6,23.59 15.6,27.42
N$84
  Top 0.305: 22.89,41.34 OK4.2
  Top 0.813: R35.2 23.34,47.05 22.89,46.6 22.89,41.34
N$85  (via drill 0.6)
  Top 0.305: R35.1
  Top 0.406: DD7.23 43.68,22.14 v42.95,22.87
  Top 0.61: v28.55,31.42 28.55,46.36 27.87,47.04 R35.1
  Bottom 1.016: v42.95,22.87 31.25,22.87 28.55,25.57 v28.55,31.42
N$86  (1 unrouted)
  Top 1.016: OK4.4 25.35,37.09 25.2,37.24 13.95,37.24 13.05,36.34 13.05,27.49 | R36.1 13.04,25.64 13.1,25.7 VT4.1
N$87
  Top 0.61: 47.65,79.22 D24.A
  Top 1.016: X4.1 47.65,79.22
N$88
  Top 0.406: DD7.30 47.53,26.3 47.55,26.32 47.55,24.82 47.7,24.67 51.75,24.67 52.35,25.27 52.35,26.61 ZQ4.4
  Top 0.61: C41.2 53.86,34.71 53.86,28.05 ZQ4.4
N$89
  Top 0.406: 107.3,26.68 ZQ5.1 106.81,27.1 DD9.31
  Top 0.813: C53.2 107.3,26.68
N$90
  Top 0.305: 97.54,27.9 97.68,28 | 97.68,29.38 DD9.7
  Top 0.406: C55.1 89.52,29.02 90.64,27.9 DD9.9 97.54,27.9 | 97.68,28 97.68,29.38
N$91
  Top 0.305: D26.C
  Top 0.61: R37.2 112.59,38.75 113.24,38.1 113.24,19.64 111.67,18.07 D26.C
N$92
  Top 0.406: 87.42,17.54 D25.C
  Top 0.813: R38.2 86.57,22.34 87.42,21.49 87.42,17.54
N$93
  Top 0.305: G5.P$2+
  Top 1.016: D27.A 105.97,39.14 106.35,39.52 G5.P$2+
  Bottom 1.016: G5.P$1+ G5.P$2+
N$94
  Top 0.305: D27.C | 89.35,39.25 89.25,39.15
  Top 0.406: C56.1 96.6,30.62 96.88,30.34 DD9.8
  Top 0.61: C56.1 93.91,30.84 93.91,31.75 93.79,32.06 87.9,32.06 87.9,38.71 88.34,39.15 89.25,39.15
  Top 0.813: 99.87,39.38 D27.C | 89.25,39.15 D27.C | D28.C 89.35,39.25
N$95  (via drill 0.6)
  Top 0.305: JP5.VBUS 78.22,75.88 78.52,75.58 80.57,75.58 80.73,75.42 DD10.20
  Top 0.406: 67.85,71.38 C60.1 67.8,71.38 | C61.+ 68.35,63.88
  Top 0.61: 67.85,71.38 C59.1 | 68.35,63.88 66.08,63.88 66.1,64.61 66.1,71.06 66.08,71.38 67.8,71.38
  Top 0.813: C59.1 71.45,76.31 v72.07,76.93
  Bottom 0.813: v72.07,76.93 77.95,76.93 78.22,77.2 JP5.VBUS
N$96
  Top 0.305: DD10.16 83.33,76.48 83.05,76.76 81.26,76.76 81.25,81.96 JP5.D-
N$97
  Top 0.305: DD10.15 83.97,79.14 84,79.23 84,82.4 81.93,84.47 JP5.D+
N$98
  Top 0.305: C58.1 78.38,60.93 77.48,61.83 DD10.4 77.47,67.34 77.55,67.42 82.5,67.42 82.5,69.4 | 82.5,69.4 82.5,69.64 82.67,69.88 DD10.17 | R40.1 82.71,69.24 82.5,69.4
N$99
  Top 0.305: R40.2 84.45,66.34 83.98,65.87 DD10.14
N$100
  Top 0.305: DD10.1 R41.1
  Top 0.406: R41.1
N$101
  Top 0.406: R42.1 68.59,85.41 67.6,86.4 67.6,90.6 D5/TX4.A
N$102
  Top 0.406: R43.1 90.22,86.62 90.4,86.8 91.3,86.8 92.16,87.66 92.16,90.84 D6/RX4.A
N$103  (via drill 0.6)  (1 unrouted)
  Top 0.305: 78.77,71.53 78.77,72.77 78.67,72.91 78.14,72.91 78.03,73.02 78.03,74 | 78.03,74 78.03,74.22 | v78,74.16 78,74.03 78.03,74
  Top 0.406: 70.71,80.86 70.71,85.69 69.6,86.8 69.6,88 70.6,89 70.6,90.6 D5/TX4.C
  Top 0.813: 70.71,80.86 73.73,77.45 73.75,74.3 v74.4,74.27
  Bottom 0.406: 77.89,74.27 v78,74.16
  Bottom 1.016: v74.4,74.27 77.89,74.27
N$104  (via drill 0.6)
  Top 0.305: DD10.22 79.42,74.2 79.55,74.2 v79.57,74.18 | v88.08,76.64 v88.07,76.63
  Top 0.406: v88.08,76.64 88.08,84.48 88.8,85.2 88.8,90.48 D6/RX4.C
  Bottom 1.016: v79.57,74.18 87.5,74.18 88.08,74.55 v88.07,76.63
N$105  (1 unrouted)
  Top 0.61: 75.41,20.43 74.8,21.04 75.22,21.04 D29.A 74.95,21.31
  Top 1.422: X1OUT4.2 75.41,20.43 | 74.95,21.31 74.95,22.24 73.6,23.59 73.6,27.42
N$106
  Top 0.305: 80.89,41.34 OK5.2
  Top 0.813: R44.2 81.34,47.05 80.89,46.6 80.89,41.34
N$107  (via drill 0.6)
  Top 0.305: R44.1
  Top 0.406: DD9.23 101.68,22.14 v100.95,22.87
  Top 0.61: v86.55,31.42 86.55,46.36 85.87,47.04 R44.1
  Bottom 1.016: v100.95,22.87 89.25,22.87 86.55,25.57 v86.55,31.42
N$108  (1 unrouted)
  Top 1.016: OK5.4 83.35,37.09 83.2,37.24 71.95,37.24 71.05,36.34 71.05,27.49 | R45.1 71.04,25.64 71.1,25.7 VT5.1
N$109
  Top 0.61: 105.65,79.22 D30.A
  Top 1.016: X5.1 105.65,79.22
N$110
  Top 0.406: DD9.30 105.53,26.3 105.55,26.32 105.55,24.82 105.7,24.67 109.75,24.67 110.35,25.27 110.35,26.61 ZQ5.4
  Top 0.61: C54.2 111.86,34.71 111.86,28.05 ZQ5.4
N$111
  Top 0.406: 165.3,26.68 ZQ6.1 164.81,27.1 DD11.31
  Top 0.813: C66.2 165.3,26.68
N$112
  Top 0.305: 155.54,27.9 155.68,28 | 155.68,29.38 DD11.7
  Top 0.406: C68.1 147.52,29.02 148.64,27.9 DD11.9 155.54,27.9 | 155.68,28 155.68,29.38
N$113
  Top 0.305: D32.C
  Top 0.61: R46.2 170.59,38.75 171.24,38.1 171.24,19.64 169.67,18.07 D32.C
N$114
  Top 0.406: 145.42,17.54 D31.C
  Top 0.813: R47.2 144.57,22.34 145.42,21.49 145.42,17.54
N$115
  Top 0.305: G6.P$2+
  Top 1.016: D33.A 163.97,39.14 164.35,39.52 G6.P$2+
  Bottom 1.016: G6.P$1+ G6.P$2+
N$116
  Top 0.305: D33.C | 147.35,39.25 147.25,39.15
  Top 0.406: C69.1 154.6,30.62 154.88,30.34 DD11.8
  Top 0.61: C69.1 151.91,30.84 151.91,31.75 151.79,32.06 145.9,32.06 145.9,38.71 146.34,39.15 147.25,39.15
  Top 0.813: 157.87,39.38 D33.C | 147.25,39.15 D33.C | D34.C 147.35,39.25
N$117  (via drill 0.6)
  Top 0.305: JP6.VBUS 136.22,75.88 136.52,75.58 138.57,75.58 138.73,75.42 DD12.20
  Top 0.406: 125.85,71.38 C73.1 125.8,71.38 | C74.+ 126.35,63.88
  Top 0.61: 125.85,71.38 C72.1 | 126.35,63.88 124.08,63.88 124.1,64.61 124.1,71.06 124.08,71.38 125.8,71.38
  Top 0.813: C72.1 129.45,76.31 v130.07,76.93
  Bottom 0.813: v130.07,76.93 135.95,76.93 136.22,77.2 JP6.VBUS
N$118
  Top 0.305: DD12.16 141.32,76.48 141.05,76.76 139.26,76.76 139.25,81.96 JP6.D-
N$119
  Top 0.305: DD12.15 141.97,79.14 142,79.23 142,82.4 139.93,84.47 JP6.D+
N$120
  Top 0.305: C71.1 136.38,60.93 135.48,61.83 DD12.4 135.47,67.34 135.55,67.42 140.5,67.42 140.5,69.4 | 140.5,69.4 140.5,69.64 140.67,69.88 DD12.17 | R49.1 140.71,69.24 140.5,69.4
N$121
  Top 0.305: R49.2 142.45,66.34 141.98,65.87 DD12.14
N$122
  Top 0.305: DD12.1 R50.1
  Top 0.406: R50.1
N$123
  Top 0.406: R51.1 126.59,85.41 125.6,86.4 125.6,90.6 D5/TX5.A
N$124
  Top 0.406: R52.1 148.22,86.62 148.4,86.8 149.3,86.8 150.16,87.66 150.16,90.84 D6/RX5.A
N$125  (via drill 0.6)  (1 unrouted)
  Top 0.305: 136.77,71.53 136.77,72.77 136.67,72.91 136.14,72.91 136.03,73.02 136.03,74 | 136.03,74 136.03,74.22 | v136,74.16 136,74.03 136.03,74
  Top 0.406: 128.71,80.86 128.71,85.69 127.6,86.8 127.6,88 128.6,89 128.6,90.6 D5/TX5.C
  Top 0.813: 128.71,80.86 131.73,77.45 131.75,74.3 v132.4,74.27
  Bottom 0.406: 135.89,74.27 v136,74.16
  Bottom 1.016: v132.4,74.27 135.89,74.27
N$126  (via drill 0.6)
  Top 0.305: DD12.22 137.43,74.2 137.54,74.2 v137.57,74.18 | v146.08,76.64 v146.07,76.63
  Top 0.406: v146.08,76.64 146.08,84.48 146.8,85.2 146.8,90.48 D6/RX5.C
  Bottom 1.016: v137.57,74.18 145.5,74.18 146.08,74.55 v146.07,76.63
N$127  (1 unrouted)
  Top 0.61: 133.41,20.43 132.8,21.04 133.22,21.04 D35.A 132.95,21.31
  Top 1.422: X1OUT5.2 133.41,20.43 | 132.95,21.31 132.95,22.24 131.6,23.59 131.6,27.42
N$128
  Top 0.305: 138.89,41.34 OK6.2
  Top 0.813: R53.2 139.34,47.05 138.89,46.6 138.89,41.34
N$129  (via drill 0.6)
  Top 0.305: R53.1
  Top 0.406: DD11.23 159.68,22.14 v158.95,22.87
  Top 0.61: v144.55,31.42 144.55,46.36 143.87,47.04 R53.1
  Bottom 1.016: v158.95,22.87 147.25,22.87 144.55,25.57 v144.55,31.42
N$130  (1 unrouted)
  Top 1.016: OK6.4 141.35,37.09 141.2,37.24 129.95,37.24 129.05,36.34 129.05,27.49 | R54.1 129.04,25.64 129.1,25.7 VT6.1
N$131
  Top 0.61: 163.65,79.22 D36.A
  Top 1.016: X6.1 163.65,79.22
N$132
  Top 0.406: DD11.30 163.53,26.3 163.55,26.32 163.55,24.82 163.7,24.67 167.75,24.67 168.35,25.27 168.35,26.61 ZQ6.4
  Top 0.61: C67.2 169.86,34.71 169.86,28.05 ZQ6.4
NRST3
  Top 0.406: DD7.1 44.48,33.29 XP2-SWIM3.2
  Top 0.813: S4.3 22.27,11.19 23.15,12.07 28.01,12.07 R30.1
  Bottom 0.813: S4.3 22.27,8.13 22.8,7.6 53.2,7.6 54.8,9.2 54.8,33.6 50.8,37.6 45.2,37.6 44.8,37.2 44.8,33.61 XP2-SWIM3.2
NRST4
  Top 0.406: DD9.1 102.48,33.29 XP2-SWIM4.2
  Top 0.813: S5.3 80.27,11.19 81.15,12.07 86.01,12.07 R39.1
  Bottom 0.813: S5.3 80.27,8.13 80.8,7.6 111.2,7.6 112.8,9.2 112.8,33.6 108.8,37.6 103.2,37.6 102.8,37.2 102.8,33.61 XP2-SWIM4.2
NRST5
  Top 0.406: DD11.1 160.48,33.29 XP2-SWIM5.2
  Top 0.813: S6.3 138.27,11.19 139.15,12.07 144.01,12.07 R48.1
  Bottom 0.813: S6.3 138.27,8.13 138.8,7.6 169.2,7.6 170.8,9.2 170.8,33.6 166.8,37.6 161.2,37.6 160.8,37.2 160.8,33.61 XP2-SWIM5.2
RESET3
  Top 0.305: DD7.11
  Top 0.406: XP1.2-SPI3.3 37,20.43 38.65,22.08 38.65,26.19 38.55,26.29 DD7.11
RESET4
  Top 0.305: DD9.11
  Top 0.406: XP1.2-SPI4.3 95,20.43 96.65,22.08 96.65,26.19 96.55,26.29 DD9.11
RESET5
  Top 0.305: DD11.11
  Top 0.406: XP1.2-SPI5.3 153,20.43 154.65,22.08 154.65,26.19 154.55,26.29 DD11.11
SC3
  Top 0.406: DD7.17 38.88,17.52 40.8,15.6 44.4,15.6 44.8,15.2 44.8,10.95 XP1.1-SPI3.1
SC4
  Top 0.406: DD9.17 96.88,17.52 98.8,15.6 102.4,15.6 102.8,15.2 102.8,10.95 XP1.1-SPI4.1
SC5
  Top 0.406: DD11.17 154.88,17.52 156.8,15.6 160.4,15.6 160.8,15.2 160.8,10.95 XP1.1-SPI5.1
SCK3
  Top 0.406: DD7.18 39.68,17.92 41.2,16.4 44.8,16.4 47.2,14 47.2,10.89 XP1.1-SPI3.2
SCK4
  Top 0.406: DD9.18 97.68,17.92 99.2,16.4 102.8,16.4 105.2,14 105.2,10.89 XP1.1-SPI4.2
SCK5
  Top 0.406: DD11.18 155.68,17.92 157.2,16.4 160.8,16.4 163.2,14 163.2,10.89 XP1.1-SPI5.2
STATUS3
  Top 0.305: 47.44,18.12 47.5,18.06 | D20.A
  Top 0.406: DD7.24 44.48,20.11 44.61,19.98 46.9,19.98 47.44,19.44 47.44,18.12 | 47.5,18.06 D20.A
STATUS4
  Top 0.305: 105.44,18.12 105.5,18.06 | D26.A
  Top 0.406: DD9.24 102.48,20.11 102.61,19.98 104.9,19.98 105.44,19.44 105.44,18.12 | 105.5,18.06 D26.A
STATUS5
  Top 0.305: 163.44,18.12 163.5,18.06 | D32.A
  Top 0.406: DD11.24 160.48,20.11 160.61,19.98 162.9,19.98 163.44,19.44 163.44,18.12 | 163.5,18.06 D32.A
SWIM3
  Top 0.305: 47.22,27.98 47.14,27.9
  Top 0.406: XP2-SWIM3.1 47.22,27.98 | 47.14,27.9 DD7.32
SWIM4
  Top 0.305: 105.22,27.98 105.14,27.9
  Top 0.406: XP2-SWIM4.1 105.22,27.98 | 105.14,27.9 DD9.32
SWIM5
  Top 0.305: 163.22,27.98 163.14,27.9
  Top 0.406: XP2-SWIM5.1 163.22,27.98 | 163.14,27.9 DD11.32

## Text on the board
_tNames: GND | X1 | +12V | GND | X1 | +12V | GND | X1 | +12V | D6/RX | D6/RX | D6/RX | D5/TX | D5/TX | D5/TX | R6 | R6 | R6 | R7 | R7 | R7 | C12 | C12 | C12 | D6 | D6 | D6 | C8 | C9 | SMART-LOCK UK V1.0 | C8 | C9 | SMART-LOCK UK V1.0 | C8 | C9 | SMART-LOCK UK V1.0 | DA1 | DA1 | DA1 | DD2 | DD2 | DD2 | C11 | C11 | C11 | R4 | R4 | R4 | C13 | C13 | C13 | C7 | C7 | C7 | R5 | R5 | R5 | C6 | C6 | C6 | D3 | D3 | D3 | VT1 | R8 | C10 | G1 | VT1 | R8 | C10 | G1 | VT1 | R8 | C10 | G1 | R1 | R1 | R1 | OK1 | D4 | OK1 | D4 | OK1 | D4 | GND | 3.3V | RST | SW | GND | 3.3V | RST | SW | GND | 3.3V | RST | SW | C3 | C2 | C2 | C2 | C4 | C1 | C3 | C4 | C1 | C3 | C4 | C1 | DD1 | DD1 | DD1 | ZQ1 | ZQ1 | ZQ1 | R9 | D5 | R9 | D5 | R9 | D5 | R2 | R2 | R2 | CONTROL | CONTROL | CONTROL | CON1 | CON2 | D1 | D2 | CON1 | CON2 | D1 | D2 | CON1 | CON2 | D1 | D2 | S1 | C5 | S1 | C5 | S1 | C5 | R3 | STATUS | R3 | STATUS | R3 | STATUS | X1OUT | X1OUT | X1OUT | 3.3V | RST | GND | CS | SCK | MOSI | MISO | 3.3V | RST | GND | CS | SCK | MOSI | MISO | 3.3V | RST | GND | CS | SCK | MOSI | MISO | RESET | RESET | RESET